# Altium PCB MCU.PcbDoc
Units mm, origin at the board's own origin, x right, y up, seen from the top; angles counter-clockwise.
Board outline 157.23 x 58.25 mm, 2 copper layers (Top Layer, Bottom Layer), stack 1.271 mm thick; 52 components, 43 nets, 209 pads, 42 vias.
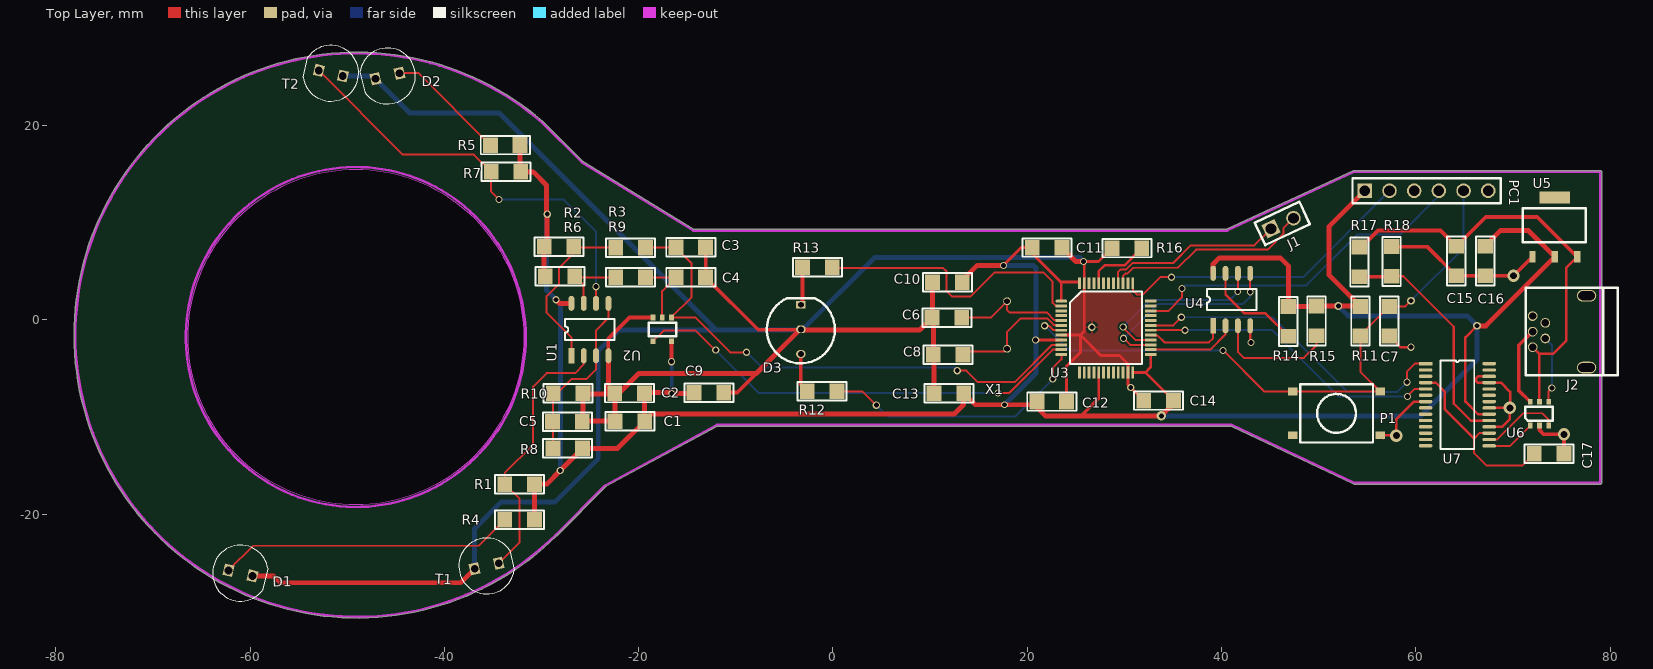
[diagram p0: Top Layer view]
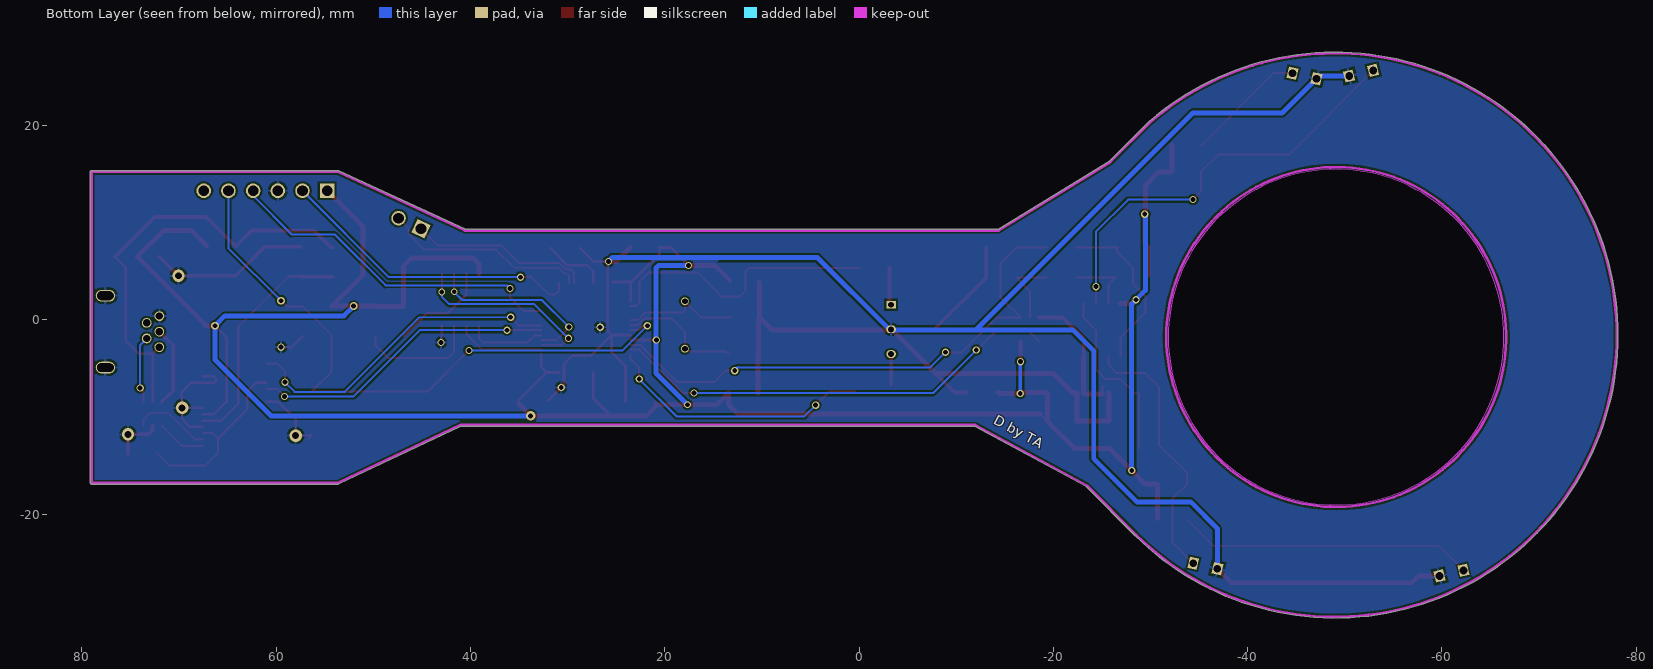
[diagram p1: Bottom Layer view, seen from below]

## Layer stack, top to bottom
Top Solder: solder mask 0.0102, Solder Resist, Dk 3.5
Top Layer: signal copper 0.0356
Dielectric 1: dielectric 1.2, FR-4, Dk 4.8
Bottom Layer: signal copper 0.0356
Bottom Solder: solder mask 0.0102, Solder Resist, Dk 3.5

## Board outline
-28.439,-22.201 ccw(c-28.529,-22.11) -28.438,-22.2 -28.439,-22.2 -23.385,-17.147 -11.945,-10.93 40.994,-10.93 ccw(c40.994,-10.803) 41.034,-10.924 53.588,-16.879 ccw(c53.643,-16.764) 53.643,-16.891 78.994,-16.891 ccw(c78.994,-16.764) 79.121,-16.764 79.121,15.236 ccw(c78.994,15.236) 78.994,15.363 53.643,15.363 ccw(c53.643,15.236) 53.59,15.352 40.527,9.352 ccw(c40.58,9.236) 40.488,9.325 -14.343,9.325 -25.779,16.331 -29.897,20.449 ccw(c-29.987,20.359) -29.904,20.456 ccw(c-48.983,-1.553)
cut-out: -31.833,-1.762 cw(c-49.105,-1.762) -49.105,-19.034 cw(c-49.105,-1.762) -66.377,-1.762 cw(c-49.105,-1.762) -49.105,15.51 cw(c-49.105,-1.762)

## Design rules (kind name [scope] priority, off if disabled: settings)
Clearance [All] p1: gap=0.2
PolygonConnect [All] p1: connectstyle=Relief reliefconductorwidth=0.254 reliefentries=4 polygonreliefangle="90 Angle" airgapwidth=0.254
RoutingVias [All] p1: holewidth=0.711 width=1.27 viastyle="Through Hole" minholewidth=0.711 minwidth=1.27 maxholewidth=0.711 maxwidth=1.27
SolderMaskExpansion [All] p1: expansion=0.102
Width VBUS [InNet('VBUS')] p1: maxlimit=0.381 minlimit=0.254 preferedwidth=0.381
Width +3V3 [InNet('+3V3')] p2: maxlimit=0.508 minlimit=0.254 preferedwidth=0.508
Width GND [InNet('GND')] p3: maxlimit=0.508 minlimit=0.254 preferedwidth=0.508
Width [All] p4: maxlimit=0.381 minlimit=0.203 preferedwidth=0.203
30 further rules are at their usual default settings.

## Classes and differential pairs
component class "MCU board": C6 C7 C8 D3 P1 PC1 R11 R12 R13 R14 R15 R16 U3 X1
component class Sensor: C1 C2 C3 C4 C5 D1 D2 R1 R2 R3 R4 R5 R6 R7 R8 R9 R10 T1 T2 U1 U2
component class IO: C9 C10 C11 C12 C13 C14 C15 C16 C17 J1 J2 R17 R18 U5 U6 U7

## Components (designator, comment, footprint, x,y, rotation, side; value= is the part's Value field where it differs from the comment)
C1 "CAP" C1206 -20.879,-10.465 r180 top
C2 "CAP" C1206 -20.904,-7.569 r180 top
C3 "CAP" C1206 -14.656,7.518 r0 top
C4 "CAP" C1206 -14.656,4.445 r0 top
C5 "CAP" C1206 -27.305,-10.541 r180 top
C6 "CAP" C1206 11.707,0.293 r0 top
C7 "CAP" C1206 57.3,-0.1 r270 top
C8 "CAP" C1206 11.834,-3.517 r0 top
C9 "CAP" C1206 -12.8,-7.425 r0 top
C10 "CAP" C1206 11.809,3.823 r180 top
C11 "CAP" C1206 22.02,7.506 r0 top
C12 "CAP" C1206 22.502,-8.343 r0 top
C13 "CAP" C1206 11.961,-7.581 r180 top
C14 "CAP" C1206 33.551,-8.343 r180 top
C15 "CAP" C1206 64.2,6.1 r270 top
C16 "CAP" C1206 67.2,6.1 r270 top
C17 "CAP" C1206 73.7,-13.7 r0 top
D1 "L-53F3C" "5mm LED" -60.985,-26.06 r167 top
D2 "L-53F3C" "5mm LED" -45.847,25.121 r13 top
D3 "L-59SU" 5mmLEDBiCol -3.302,-0.965 r270 top
J1 "2X1 PIN" 2X1PINHEAD 45.1,9.4 r25 top
J2 "USB Conenctor" USB_MINI 74.8,-1.2 r90 top
P1 "BTN" PBUTTON 51.839,-9.613 r0 top
PC1 "STLINK" SWD 61.1,13.3 r0 top
R1 "1206" R1206 -32.131,-16.891 r180 top
R2 "1206" R1206 -28.321,7.518 r0 top
R3 "1206" R1206 -20.955,7.442 r0 top
R4 "1206" R1206 -32.131,-20.574 r180 top
R5 "1206" R1206 -33.604,18.009 r180 top
R6 "1206" R1206 -28.219,4.521 r0 top
R7 "1206" R1206 -33.528,15.24 r180 top
R8 "1206" R1206 -27.178,-13.208 r180 top
R9 "1206" R1206 -20.955,4.394 r0 top
R10 "1206" R1206 -27.381,-7.544 r0 top
R11 "1206" R1206 54.3,0 r270 top
R12 "1206" R1206 -0.991,-7.341 r180 top
R13 "1206" R1206 -1.473,5.41 r180 top
R14 "1206" R1206 46.875,-0.025 r270 top
R15 "1206" R1206 49.775,-0.225 r90 top
R16 "1206" R1206 30.376,7.405 r180 top
R17 "1206" R1206 54.2,6.1 r270 top
R18 "1206" R1206 57.5,5.9 r90 top
T1 "L-53P3C" "5mm LED" -35.636,-25.324 r193 top
T2 "L-53P3C" "5mm LED" -51.689,25.4 r347 top
U1 "MCP6567-E/SN" SOIC8 -26.924,-3.683 r90 top
U2 "SN74AUP1G80DCKR" SOT23-5 -19.152,0.787 r270 top
U3 "STM32F373CC" LQFP48 23.264,1.944 r0 top
U4 "M95160" SOIC8 39.139,-0.596 r90 top
U5 "TS1117BCW-3.3" SOT-223 72,6.5 r90 top
U6 "STF203" SOT23-6 74.3,-11.4 r90 top
U7 "FT232RL" SSOP28 61,-4.5 r0 top
X1 "XTAL" HC49 17.93,-0.469 r270 top

## Footprints (in the part's own frame and the unit in brackets; to place one, negate y for a bottom-side part, rotate by r counter-clockwise, add the part's x,y. Pads: shape width x height; smd on the part's side, far side on the other; paste and mask are expansions set on the pad)
2X1PINHEAD [mm]
  rect 1.5x1.5 hole 1.1: 1(0,0)
  round 1.5 hole 1.1: 2(2.54,0)
  silkscreen extent -1.27,-1.27 3.81,1.27, body extent -1.27,-1.27 3.81,1.27, height 8.19
"5mm LED" [mm]
  rect 1x1.2 hole 0.8: 1(-1.27,0) 2(1.27,0)
  silkscreen extent -2.67,-2.87 2.88,2.87, body extent -2.5,-9.88 2.95,0.13, height 1.75
5mmLEDBiCol [mm]
  rect 0.8x1 hole 0.6: 1(-2.54,0)
  oval 0.8x1 hole 0.6: 2(0,0) 3(2.54,0)
  silkscreen extent -3.2,-3.5 3.5,3.5, body extent -2.79,-2.92 2.95,2.97, height 11.61
C1206 [mm]
  rect 1.52x1.6 smd: 1(-1.5,-0.05) 2(1.55,-0.05)
  silkscreen extent -2.5,-1 2.55,0.9, body extent -1.55,-0.85 1.65,0.75, height 1
HC49 [mm]
  round 0.8 hole 0.6: 1(-2.4,0) 2(2.5,0)
  body extent -5.61,-2.35 5.72,2.3, height 3.7
LQFP48 [mm]
  oval 1.2x0.3 smd: 1(0.254,0)
  rect 1.2x0.3 smd: 2(0.254,-0.5) 3(0.254,-1) 4(0.254,-1.5) 5(0.254,-2) 6(0.254,-2.5) 7(0.254,-3) 8(0.254,-3.5) 9(0.254,-4) 10(0.254,-4.5) 11(0.254,-5) 12(0.254,-5.5) 25(9.446,-5.5) 26(9.446,-5) 27(9.446,-4.5) 28(9.446,-4) 29(9.446,-3.5) 30(9.446,-3) 31(9.446,-2.5) 32(9.446,-2) 33(9.446,-1.5) 34(9.446,-1) 35(9.446,-0.5) 36(9.446,0)
  rect 0.3x1.2 smd: 13(2.1,-7.346) 14(2.6,-7.346) 15(3.1,-7.346) 16(3.6,-7.346) 17(4.1,-7.346) 18(4.6,-7.346) 19(5.1,-7.346) 20(5.6,-7.346) 21(6.1,-7.346) 22(6.6,-7.346) 23(7.1,-7.346) 24(7.6,-7.346) 37(7.6,1.846) 38(7.1,1.846) 39(6.6,1.846) 40(6.1,1.846) 41(5.6,1.846) 42(5.1,1.846) 43(4.6,1.846) 44(4.1,1.846) 45(3.6,1.846) 46(3.1,1.846) 47(2.6,1.846) 48(2.1,1.846)
  silkscreen extent 1.13,-6.46 8.56,0.97, body extent 0.44,-7.18 9.21,1.59, height 1.55
PBUTTON [mm]
  rect 1x0.8 smd: 1(-4.5,2.25) 2(4.5,2.25) 3(-4.5,-2.25) 4(4.5,-2.25)
  silkscreen extent -3.75,-3 3.75,3, body extent -4.05,-3.12 3.95,3.38, height 4.3
R1206 [mm]
  rect 1.52x1.6 smd: 1(-1.4,0) 2(1.65,0)
  silkscreen extent -2.4,-0.95 2.65,0.95, body extent -1.5,-0.8 1.7,0.8, height 0.6
SOIC8 [mm]
  rect 1.55x0.6 smd: 1(0,0)
  oval 1.55x0.6 smd: 2(0,-1.27) 3(0,-2.54) 4(0,-3.81) 5(5.4,-3.81) 6(5.4,-2.54) 7(5.4,-1.27) 8(5.4,0)
  silkscreen extent 1.61,-4.44 3.79,0.64, body extent -0.33,-4.36 5.67,0.55, height 1.75
SOT23-5 [mm]
  rect 0.6x0.5 smd: 1(0.525,2.525) 2(0.525,1.575) 3(0.525,0.625) 4(2.975,0.625) 5(2.975,2.525)
  silkscreen extent 1.05,0.19 2.45,3.04, body extent 0.38,0.13 3.18,3.03, height 1.45
SOT23-6 [mm]
  rect 0.6x0.5 smd: 1(0.525,2.525) 2(0.525,1.575) 3(0.525,0.625) 4(2.975,0.625) 5(2.98,1.584) 6(2.975,2.525)
  silkscreen extent 1.05,0.19 2.45,3.04, body extent 0.33,0.12 3.13,3.02, height 1.45
SOT-223 [mm]
  rect 1.2x0.65 smd: 1(0,0) 2(0,-2.3) 3(0,-4.6)
  rect 1.2x3.1 smd: 4(6.1,-2.3)
  silkscreen extent 1.5,-5.5 5,1, body extent -0.37,-5.55 6.57,0.95, height 1.64
SSOP28 [mm]
  rect 1.4x0.35 smd: 1(0,0)
  oval 1.4x0.35 smd: 2(0,-0.65) 3(0,-1.3) 4(0,-1.95) 5(0,-2.6) 6(0,-3.25) 7(0,-3.9) 8(0,-4.55) 9(0,-5.2) 10(0,-5.85) 11(0,-6.5) 12(0,-7.15) 13(0,-7.8) 14(0,-8.45) 15(6.55,-8.45) 16(6.55,-7.8) 17(6.55,-7.15) 18(6.55,-6.5) 19(6.55,-5.85) 20(6.55,-5.2) 21(6.55,-4.55) 22(6.55,-3.9) 23(6.55,-3.25) 24(6.55,-2.6) 25(6.55,-1.95) 26(6.55,-1.3) 27(6.55,-0.65) 28(6.55,0)
  silkscreen extent 1.53,-8.78 5.02,0.33, body extent -0.63,-9.39 7.13,0.94, height 2.15
SWD [mm]
  rect 1.5x1.5 hole 1.1: 1(-6.35,0)
  round 1.5 hole 1.1: 2(-3.81,0) 3(-1.27,0) 4(1.27,0) 5(3.81,0) 6(6.35,0)
  silkscreen extent -7.62,-1.27 7.62,1.27, body extent -7.62,-1.27 7.62,1.27, height 8.27
USB_MINI [mm]
  round 1 hole 0.75: 1(-1.6,2.775) 2(-0.7,1.475) 3(0,2.775) 4(0.9,1.475) 5(1.6,2.775)
  oval 1.2x2 hole 0.9 slot 1.7 at 90 deg: 6(3.7,-2.775) 7(-3.7,-2.775)
  silkscreen extent -4.5,-6 4.5,3.5, body extent -3.75,-6.05 3.95,2.95, height 4.15

## Part data
C1 C2 C3 C4 C5 C6 C7 C8 C9 C10 C11 C12 C13 C14 C15 C16 C17: "Capacitor"
D1 D2: "L-53F3C- IR EMITTING DIODE, 940NM, 5MM"
D3: "RED/GRE BICOL"
J1: "Pin Header 2x1"
J2: library part USB, "USB connector"
P1: "Push Button"
PC1: "STLINK programming tool connector"
R1 R2 R3 R4 R5 R6 R7 R8 R9 R10 R11 R12 R13 R14 R15 R16 R17 R18: library part RES, "1206 Resistor"
T1 T2: "L-53P3C- PHOTO TRANSISTOR, NPN 5mm"
U1: "MICROCHIP - MCP6567-E/SN - IC, COMPARATOR, DUAL, 1.8V, 8SOIC"
U2: "TEXAS INSTRUMENTS - SN74AUP1G80DCKR - FLIP FLOP, D-TYPE, 280MHZ, SC-70-5"
U4: "SPI Flash Memory 16kbit"
U5: "TAIWAN SEMICONDUCTOR - TS1117BCW-3.3 - LDO VOLTAGE REG, 0.8A, 12V, SOT223-3"
U6: "STF203 - IC, FILTER, USB, ESD PROTECT, SOT236"
U7: "USB-UART Bridge FTDI device"
X1: "Quartz Crystal"

## Via types
v1: diameter 0.75, hole 0.5, Top Layer to Bottom Layer, 29 vias
v2: diameter 1.27, hole 0.711, Top Layer to Bottom Layer, 4 vias
v3: diameter 0.7, hole 0.5, Top Layer to Bottom Layer, 4 vias
v4: diameter 0.8, hole 0.5, Top Layer to Bottom Layer, 3 vias
v5: diameter 1, hole 0.5, Top Layer to Bottom Layer, 1 vias
v6: diameter 0.75, hole 0.5, Top Layer to Bottom Layer, tented top, 1 vias

## Nets (pads, with @x,y where several pads share a name; then routed paths per layer and width w, separated by ;. In a path a pad name is that pad's centre, name@x,y a point inside that pad or via, vN(x,y) a via of type N, cw(c..) or ccw(c..) an arc to the next point about the centre after c; other vN are vias at no path point)
+3V3: C1.1 C2.1 C9.1 C10.1 C11.1 C12.1 C13.1 C14.1 C16.1 PC1.1 R1.1 R2.1 R4.1 R5.1 R6.1 R7.1 R8.1 R11.1 R14.1 R15.2 U1.8 U2.5 U3.1 U3.9 U3.17 U3.24 U3.25 U3.48 U4.8 U5.2 U7.20 | length 305.6
  Top Layer w0.203: R7.1@-32.204,15.316 R7.1 ; C2.1 C2.1@-19.379,-7.545 ; C1.1 C1.1@-18.664,-9.7 ; C10.1 C10.1@13.309,4.075 ; C11.1@20.52,6.847 C11.1 ; C12.1@20.671,-8.724 C12.1 C12.1@21.002,-9.002 ; C14.1@35.051,-8.621 C14.1
  Top Layer w0.254: 23.45,3.917 23.518,3.849 U3.1 ; v4(66.3,-0.6) 65.1,-1.8 65.1,-8.4 66.4,-9.7 U7.20
  Top Layer w0.279: v1(20.864,-2.056) U3.9 ; 23.45,3.917 U3.48@25.364,3.917 ; 27.364,-8.053 U3.17 ; U3.24 32.16,-5.402 ; 32.71,-4.852 U3.25
  Top Layer w0.305: v1@17.549,5.627 19.379,7.456 C11.1 ; C11.1@20.52,6.847 23.45,3.917 ; 25.55,-9.867 27.364,-8.053 ; 32.71,-4.852 32.16,-5.402 C14.1
  Top Layer w0.381: v1@-16.627,-4.278 U2.5
  Top Layer w0.508: R7.1@-32.204,15.316 R5.1 ; R7.1 -30.861,15.24 -29.464,13.843 -29.464,10.947 v1(-29.413,10.897) -29.413,7.826 R2.1 -29.721,4.623 R6.1 ; R1.1 -29.461,-16.891 v1(-28.064,-15.494) R8.1 -22.172,-13.208 C1.1 C2.1@-19.379,-7.545 ; R4.1@-30.706,-20.447 R1.1@-30.706,-17.145 ; v1(-28.499,2.083) -28.133,1.717 U1.8 ; C2.1@-19.352,-7.467 v1@-16.815,-7.467 ; C1.1@-18.664,-9.7 12.459,-9.7 13.461,-8.697 C13.1 14.654,-8.724 v3(17.663,-8.724) C12.1@20.671,-8.724 ; v1(-16.586,-7.569) -14.419,-7.569 C9.1@-14.3,-7.45 ; C10.1@13.309,4.075 14.861,5.627 v1@17.549,5.627 ; C12.1@21.002,-9.002 21.867,-9.867 25.55,-9.867 v5(33.805,-9.867) C14.1@35.051,-8.621 ; U4.8 39.139,5.764 39.775,6.4 46.05,6.4 46.875,5.575 R14.1 49.725,1.375 R15.2 v4(52.025,1.425) R11.1@54.275,1.425 ; R11.1 R11.1@54.275,1.425 ; PC1.1 51.05,9.6 51.05,4.65 R11.1@54.275,1.425 ; v4(66.3,-0.6) 67.2,-0.6 U5.2 71.6,9.2 68.7,9.2 67.15,7.65 C16.1
  Bottom Layer w0.381: v1(-16.586,-7.569) v1@-16.586,-4.293
  Bottom Layer w0.508: v1@-29.464,10.897 -29.464,3.048 -28.064,1.648 v1(-28.064,-15.494) ; v1@17.549,5.627 20.623,5.627 20.902,5.347 20.902,-5.485 v3(17.663,-8.724) ; v5(33.805,-9.867) 60.533,-9.867 66.3,-4.1 v4(66.3,-0.6) 65.275,0.425 53.025,0.425 v4(52.025,1.425)
  other v1: -16.612,-4.293 17.549,5.601
GND: C1.2 C2.2 C3.2 C4.2 C5.1 C6.1 C7.2 C8.1 C9.2 C10.2 C11.2 C12.2 C13.2 C14.2 C15.2 C16.2 C17.2 D1.1 D2.1 D3.2 J2.5 J2.6 J2.7 P1.4 PC1.3 R10.2 R16.2 R18.2 T1.2 T2.2 U1.4 U2.3 U3.8 U3.23 U3.47 U4.4 U5.1 U6.2 U7.7 U7.18 U7.21 U7.25 U7.26 | length 327.9
  Top Layer w0.203: R10.2@-25.047,-7.62 R10.2@-25.047,-6.86 ; C1.2@-22.505,-10.491 C1.2@-22.454,-10.44 ; C6.1 C6.1@10.334,0.116 ; P1.4 P1.4@56.656,-12.179
  Top Layer w0.254: U4.4 42.949,-2.249 v1(43.025,-2.325) ; P1.4 57.963,-11.863 57.963,-10.237 59.8,-8.4 U7.7 ; C7.2 58.4,-2.8 v1(59.5,-2.8) ; U7.18 68.875,-11 69.675,-10.2 v2(69.675,-9.05) ; U7.21 69.7,-9.05 69.7,-7.4 68.75,-6.45 U7.25 66.35,-6.45 66.2,-6.3 66.2,-6 66.4,-5.8 U7.26
  Top Layer w0.279: U3.8 25.479,-1.556 ; 25.864,-1.171 U3.47 v3@25.864,6.008 ; 30.364,-6.656 U3.23 30.364,-4.521
  Top Layer w0.305: C12.2 24.053,-4.761 25.479,-3.334 25.479,-1.556 ; v3(25.804,6.008) 25.864,6.008 27.329,6.008 R16.2 ; 25.864,-1.171 25.479,-1.556 ; 30.364,-6.656 C14.2 ; 30.364,-4.521 29.487,-3.644 27.567,-3.644 25.479,-1.556
  Top Layer w0.381: U1.4 -23.114,-1.905 -20.947,0.262 U2.3 ; C3.2 C4.2 -7.694,-1.016 D3.2@-3.404,-1.016 ; C9.2@-11.048,-7.467 -9.854,-7.467 -7.899,-5.512 ; R18.2 61.15,7.55 C15.2 C16.2 v2(70.05,4.55) U5.1 ; U6.2 72.725,-11.325 73.175,-11.775 v2(75.25,-11.775) C17.2
  Top Layer w0.508: D1.1 -57.601,-26.346 -56.896,-27.051 -38.315,-27.051 T1.2 ; C5.1@-25.729,-10.415 C5.1@-25.707,-10.415 ; R10.2@-25.707,-7.519 C5.1@-25.707,-10.415 ; R10.2@-25.047,-7.62 -23.114,-7.62 U1.4 ; C1.2@-22.454,-10.44 C1.2@-22.454,-10.415 ; C1.2 C1.2@-22.454,-10.415 ; 8.89,-1.016 -3.404,-1.016 -7.899,-5.512 -19.99,-5.512 -21.997,-7.519 C2.2 C1.2@-22.454,-10.415 ; 8.987,-0.977 C6.1 ; C6.1@10.259,0.294 C10.2 ; C8.1 C6.1@10.334,0.116 ; C13.2 C8.1@10.411,-3.644 ; C11.2 25.019,6.008 v3(25.804,6.008) ; C5.1@-25.707,-10.415 C1.2@-22.454,-10.415
  Bottom Layer w0.305: D2.1@-47.364,25.114 D2.1
  Bottom Layer w0.508: T2.2 D2.1@-47.364,25.114 ; D2.1 -43.56,21.311 -34.366,21.311 -12.04,-1.016 -21.996,-1.016 -24.155,-3.175 -24.155,-14.275 -28.6,-18.72 -34.123,-18.72 -36.874,-21.47 T1.2 ; -11.938,-1.016 -3.15,-1.016 4.297,6.43 25.382,6.43 v3(25.804,6.008)
  other v1: 30.656,-6.946
  other v2: 58,-11.9
  other v6: 26.65,-0.75
NetC3_1: C3.1 R3.2 U2.1 U3.10 | length 56.3
  Top Layer w0.203: R3.2 -16.182,7.442 -14.554,5.815 -14.554,2.335 U2.1 -14.182,0.262 -10.592,-3.327 v1(-8.89,-3.327) ; v1(12.8,-5.219) 13.742,-5.219 14.91,-6.387 18.718,-6.387 22.549,-2.556 U3.10
  Bottom Layer w0.203: v1(-8.89,-3.327) -7.341,-4.877 12.446,-4.877 ; 12.469,-4.838 v1@12.8,-5.168
NetC4_1: C4.1 R9.2 U2.2 | length 7.9
  Top Layer w0.203: R9.2 C4.1 -17.577,2.974 U2.2
NetC5_2: C5.2 R8.2 R10.1 U1.3 U1.5 | length 18.4
  Top Layer w0.203: R8.2 -28.828,-7.591 R10.1 -28.372,-7.544 -26.924,-6.096 -25.4,-6.096 -24.384,-5.08 U1.3 -24.384,-1.067 -23.114,0.203 U1.5
NetC7_1: C7.1 P1.1 P1.2 PC1.5 R11.2 U3.7 | length 66.2
  Top Layer w0.203: v1(21.791,-0.596) 22.241,-0.596 22.653,-1.008 23.47,-1.008 U3.7 ; v1(40.155,-3.136) 44.382,-7.363 P1.1 P1.2 54.3,-5.324 R11.2 54.3,-1.55 C7.1 58.925,1.4 v4(59.5,1.975)
  Bottom Layer w0.203: v1(21.791,-0.596) 24.331,-3.136 v1(40.155,-3.136) ; v4(59.5,1.975) 64.91,7.385 PC1.5
NetC17_1: C17.1 U7.4 U7.17 | length 19
  Top Layer w0.203: U7.17 66.55,-11.65 66,-12.2 66,-13.7 67.3,-15 70.95,-15 C17.1
  Top Layer w0.254: U7.4 62.05,-6.45 63,-7.4 63,-9.2 66,-12.2
NetD1_2: D1.2 R4.2 | length 30.6
  Top Layer w0.203: D1.2 -59.689,-23.241 -36.448,-23.241 R4.2
NetD2_2: D2.2 R5.2 | length 12.4
  Top Layer w0.203: D2.2 -42.652,25.406 R5.2
NetD3_1: D3.1 R13.2 | length 3.9
  Top Layer w0.381: D3.1 -3.123,1.753 R13.2
NetD3_3: D3.3 R12.2 | length 3.2
  Top Layer w0.381: R12.2@-3.302,-6.68 D3.3
NetJ1_1: J1.1 U3.40 | length 18.7
  Top Layer w0.203: U3.40 29.364,4.951 29.612,5.198 30.176,5.198 30.858,5.88 35.055,5.88 36.85,7.675 43.375,7.675 J1.1
NetJ1_2: J1.2 U3.39 | length 21.1
  Top Layer w0.203: U3.39 29.864,4.539 30.12,4.795 30.343,4.795 30.923,5.375 35.5,5.375 37.375,7.25 44.736,7.25 46.398,8.912 46.398,9.47 J1.2
NetJ2_2: J2.2 U6.4 | length 6.9
  Top Layer w0.203: U6.4 73.675,-7.325 v1(74,-7)
  Bottom Layer w0.203: J2.2 74,-2.575 v1(74,-7)
NetJ2_3: J2.3 U6.6 | length 8.3
  Top Layer w0.381: U6.6 70.6,-7.25 70.6,-2.6 72,-1.2 J2.3
NetPC1_2: PC1.2 U3.37 | length 31.8
  Top Layer w0.203: U3.37 30.864,3.011 31.25,2.625 31.929,2.625 32.504,3.2 32.5,3.2 33.7,4.4 v1(34.85,4.4)
  Bottom Layer w0.203: v1(34.85,4.4) 48.39,4.4 PC1.2
NetPC1_4: PC1.4 U3.34 | length 35.6
  Top Layer w0.203: U3.34 34.544,0.944 35.925,2.325 v1(35.925,3.25)
  Bottom Layer w0.203: v1(35.925,3.25) 36.227,3.552 48.727,3.552 53.975,8.8 58.4,8.8 62.37,12.77 PC1.4
NetR1_2: R1.2 T1.1 U1.2 | length 28
  Top Layer w0.203: T1.1 -32.258,-22.897 -32.258,-18.414 R1.2 -33.781,-15.747 -30.861,-12.827 -30.861,-6.858 -29.464,-5.461 -26.543,-5.461 -25.654,-4.572 U1.2
NetR2_2: R2.2 R3.1 U1.1 | length 17.7
  Top Layer w0.203: U1.1 -26.924,-1.778 -29.464,0.762 -29.464,2.464 -28.194,3.734 -28.194,5.385 -26.544,7.035 R2.2@-26.544,7.442 ; R2.2 -26.594,7.442 R2.2@-26.544,7.442 ; R3.1 R2.2@-26.544,7.442
NetR6_2: R6.2 R9.1 U1.7 | length 7.1
  Top Layer w0.203: U1.7 -25.654,3.606 -26.442,4.394 R9.1
NetR7_2: R7.2 T2.1 U1.6 | length 44
  Top Layer w0.203: T2.1 -44.266,17.025 -36.963,17.025 R7.2 -35.178,13.207 v1(-34.366,12.395) ; U1.6 v1(-24.384,3.429)
  Bottom Layer w0.203: v1(-34.366,12.395) -27.686,12.395 -24.384,9.093 v1(-24.384,3.429)
NetR12_1: R12.1 U3.12 | length 27.7
  Top Layer w0.203: R12.1 3.023,-7.341 v1@4.458,-8.776 ; v1@22.629,-6.057 22.629,-4.94 23.518,-4.051 U3.12
  Bottom Layer w0.203: v1(4.47,-8.763) 5.625,-9.918 18.794,-9.918 v1(22.629,-6.083)
NetR13_1: R13.1 U3.2 | length 29.7
  Top Layer w0.203: R13.1@-0.076,5.334 11.303,5.334 ; 11.326,5.373 11.707,4.992 11.707,2.96 12.266,2.401 14.146,2.401 16.635,4.89 21.639,4.89 22.617,3.912 22.617,1.757 22.93,1.444 U3.2
NetR14_2: R14.2 U4.7 | length 10.4
  Top Layer w0.254: U4.7 40.409,2.641 42.375,0.675 44.525,0.675 R14.2
NetR15_1: R15.1 U4.3 | length 12.5
  Top Layer w0.203: U4.3 41.679,-3.279 42.3,-3.9 48.475,-3.9 49.775,-2.6 R15.1
NetR16_1: R16.1 U3.44 | length 6.6
  Top Layer w0.254: U3.44 27.364,5.028 27.963,5.627 29.998,5.627 R16.1
NetR17_2: R17.2 R18.1 U7.19 | length 24.1
  Top Layer w0.254: R18.1 58.7,4.5 63.9,-0.7 63.9,-8.6 65.65,-10.35 U7.19
  Top Layer w0.381: R17.2 57.45,4.45 R18.1
NetU2_4: U2.4 U3.11 | length 47.1
  Top Layer w0.203: U2.4 -17.431,-1.092 -14.122,-1.092 -12.065,-3.15 v1(-12.065,-3.099) ; v1(16.993,-7.518) 18.157,-7.518 22.619,-3.056 U3.11
  Bottom Layer w0.203: v1(-12.065,-3.099) -7.645,-7.518 v1(16.993,-7.518)
NetU3_13: U3.13
NetU3_26: U3.26 U4.2 | length 9.2
  Top Layer w0.203: U3.26 38.838,-3.056 40.409,-1.485 U4.2
NetU3_27: U3.27 U4.5 | length 20.3
  Top Layer w0.203: v1(29.919,-1.892) 30.584,-2.556 U3.27 ; v3(42.95,2.875) 42.95,4.704 42.9,4.754 U4.5
  Bottom Layer w0.203: v1(29.919,-1.892) 33.436,1.626 42.201,1.626 42.95,2.375 v3(42.95,2.875)
NetU3_28: U3.28 U4.6 | length 18.3
  Top Layer w0.203: v1@29.868,-0.799 31.125,-2.056 U3.28 ; v3(41.675,2.9) 41.675,4.694 41.732,4.751 U4.6
  Bottom Layer w0.203: v1@30.097,-0.723 30.097,-0.495 32.649,2.057 40.832,2.057 v3@41.545,2.77
  other v1: 29.868,-0.723
NetU3_29: U3.29 U4.1 | length 8.2
  Top Layer w0.203: U3.29 32.759,-1.605 33.435,-1.605 34.131,-2.3 38.7,-2.3 39.139,-1.861 U4.1
NetU3_30: U3.30 U7.5 | length 31.4
  Top Layer w0.203: U3.30 v1(36.235,-1.056) ; v1(59.131,-7.874) 59.905,-7.1 U7.5
  Bottom Layer w0.203: v1(36.235,-1.056) 45.201,-1.056 52.019,-7.874 v1(59.131,-7.874)
NetU3_31: U3.31 U7.1 | length 33.7
  Top Layer w0.203: U3.31 35.044,-0.556 35.865,0.265 v1(35.865,0.279) ; v1(59.1,-6.4) 59.1,-5.3 59.9,-4.5 U7.1
  Bottom Layer w0.203: v1(35.865,0.279) 45.263,0.279 52.934,-7.391 58.109,-7.391 v1(59.1,-6.4)
NetU3_32: U3.32
NetU3_35: U3.35
NetU3_36: U3.36
NetU6_1: U6.1 U7.15 | length 5.1
  Top Layer w0.203: U7.15 69.7,-12.95 U6.1
NetU6_3: U6.3 U7.16 | length 8.1
  Top Layer w0.203: U7.16 68.378,-12.3 71.078,-9.6 73,-9.6 73.675,-10.275 U6.3
OSC_IN: C6.2 U3.5 X1.1 | length 12.3
  Top Layer w0.203: C6.2 16.243,0.243 X1.1 17.93,1.004 18.159,0.775 22.01,0.775 22.793,-0.008 23.47,-0.008 U3.5
OSC_OUT: C8.2 U3.6 X1.2 | length 13
  Top Layer w0.203: C8.2 13.688,-3.263 17.636,-3.263 X1.2 17.93,-1.231 19.327,0.166 22.05,0.166 22.723,-0.508 23.47,-0.508 U3.6
VBUS: C15.1 J2.1 R17.1 U5.3 U6.5 | length 45.1
  Top Layer w0.254: J2.1 72.716,-3.491 ; U6.5 72.716,-3.491 ; U5.3 75.5,5.4 75.5,-2.1 74.1,-3.5 72.725,-3.5 72.716,-3.491
  Top Layer w0.381: R17.1 54.4,7.5 56.1,9.2 62.55,9.2 C15.1 ; C15.1@64.025,7.725 64.325,7.725 67.2,10.6 72.5,10.6 U5.3
pads on no net: J2.4 P1.3 PC1.6 U3.3 U3.4 U3.14 U3.15 U3.16 U3.18 U3.19 U3.20 U3.21 U3.22 U3.33 U3.38 U3.41 U3.42 U3.43 U3.45 U3.46 U5.4 U7.2 U7.3 U7.6 U7.8 U7.9 U7.10 U7.11 U7.12 U7.13 U7.14 U7.22 U7.23 U7.24 U7.27 U7.28

## Polygon pours and split planes (outlines as drawn)
GND on Bottom Layer "TopInner" (solid, remove dead copper, pour order 5): 14.18,6.43 14.197,6.414 21.309,6.414 21.309,-6.286 21.08,-6.514 20.928,-6.667 15.136,-6.667 15.136,5.474 14.18,6.43
GND on Bottom Layer "BottomGND" (solid, pour order 4): -28.439,-22.201 ccw(c-28.529,-22.11) -28.438,-22.2 -28.439,-22.2 -23.385,-17.147 -11.945,-10.93 40.994,-10.93 ccw(c40.994,-10.803) 41.034,-10.924 53.588,-16.879 ccw(c53.643,-16.764) 53.643,-16.891 78.994,-16.891 ccw(c78.994,-16.764) 79.121,-16.764 79.121,15.236 ccw(c78.994,15.236) 78.994,15.363 53.643,15.363 ccw(c53.643,15.236) 53.59,15.352 40.527,9.352 ccw(c40.58,9.236) 40.488,9.325 -14.343,9.325 -25.779,16.331 -29.897,20.449 ccw(c-29.987,20.359) -29.904,20.456 ccw(c-48.983,-1.553)
GND on Top Layer "Top Layer-No Net" (solid, pour order 11): 24.4,1.775 24.425,1.775 25.525,2.875 31.825,2.875 31.825,-4.475 31.775,-4.525 31.75,-4.5 24.35,-4.5 24.35,1.7 24.4,1.75

## Keep-outs
Keep-Out Layer:
  circle w0.254: c-49.124,-1.753 r17.5
  lines w0.254: 40.58,9.197 -14.379,9.197 -25.858,16.231 -29.987,20.359 ccw(c-48.983,-1.553) -28.529,-22.11 -23.462,-17.043 -11.978,-10.803 40.994,-10.803 ; 40.58,9.236 53.643,15.236 78.994,15.236 78.994,-16.764 53.643,-16.764 40.994,-10.764

## Silkscreen, mask and mechanical layers (free items; w line width, h text height)
Bottom Overlay:
  text "D by TA" at -13.741,-10.643 h1.02 r28.5
Mechanical 1:
  lines w0.254: 53.994,15.236 78.994,15.236